# Altium PCB 7797-20-0224.PcbDoc (part 2 of 2)
Units mil, origin at the board's own origin, x right, y up, seen from the top; angles counter-clockwise.
Board outline 1680 x 2800 mil, 2 copper layers (Top Layer, Bottom Layer), stack 12.8 mil thick; 114 components, 80 nets, 405 pads, 230 vias.
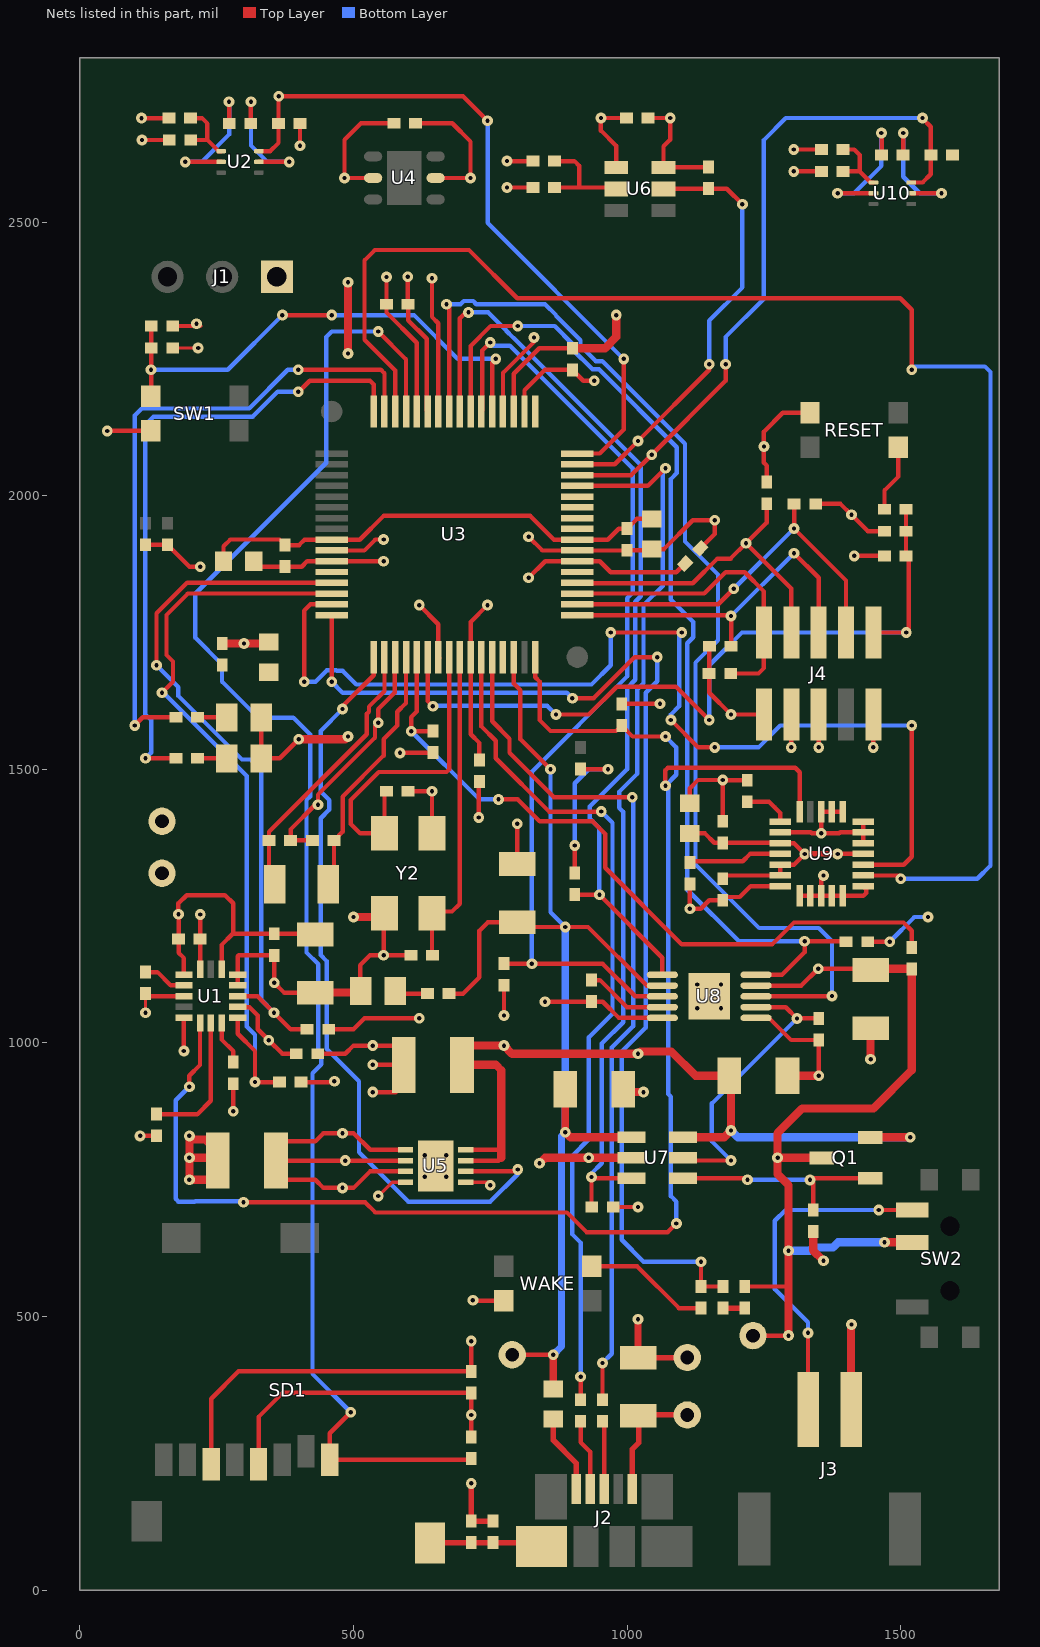
[diagram p2: the nets of this part, all layers, seen from the top]

## Via types
v1: diameter 19.68, hole 7.87, Top Layer to Bottom Layer, 230 vias

## Nets (pads, with @x,y where several pads share a name; then routed paths per layer and width w, separated by ;. In a path a pad name is that pad's centre, name@x,y a point inside that pad or via, vN(x,y) a via of type N, cw(c..) or ccw(c..) an arc to the next point about the centre after c; other vN are vias at no path point) (continued)
B3/sI2C0_SDA: R24.1 U1.6 U3.48 U9.12 | length 2922.4
  Top Layer w8: v1(200,920) 200,940 219.53,959.53 U1.6@219.53,1036.1 ; v1(298.87,708.87) 521.13,708.87 540,690 890,690 925.84,654.16 1074.16,654.16 v1(1090,670) ; U3.48@832.17,1705 832.16,1668.29 840,1660.46 840,1590 860,1570 979.69,1570 R24.1@990,1580.32 ; R24.1@990,1580 1010,1560 v1(1070,1560) ; v1(1070,1470) 1070,1498.34 1074.48,1502.81 1307.19,1502.81 1315.31,1494.69 U9.12@1315.31,1422.09
  Bottom Layer w8: v1(200,920) 175,895 175,715 180,710 210,710 210.84,710.84 296.9,710.84 v1(298.87,708.87) ; v1(1070,1560) 1090,1540 1090,1490 v1(1070,1470) 1075,1465 1075,906.52 1080,901.52 1080,720 1090,710 v1(1090,670)
C4/sIO_IND1: R7.2 U3.16 | length 1176.5
  Top Layer w8: v1(120,1520) R7.2@175.31,1520 ; v1(399.16,2190) 400,2190 420,2210 530,2210 536.89,2203.11 U3.16@536.89,2153.82
  Bottom Layer w8: v1(120,1520) 130,1530 130,1590 119.16,1600.84 119.16,2129.16 134.39,2144.39 315.61,2144.39 361.21,2190 v1(399.16,2190)
C5/sIO_IND2: R8.2 U3.15 | length 1211.5
  Top Layer w8: v1(100,1580) 115,1595 R8.2@175.31,1595 ; v1(399.16,2230) 550,2230 556.57,2223.43 U3.15@556.57,2153.82
  Bottom Layer w8: v1(100,1580) 100,2146.45 112.94,2159.39 309.39,2159.39 380,2230 v1(399.16,2230)
C6/sGYRO_INT2: U3.14 U9.2 | length 2760.6
  Top Layer w8: U3.14@576.26,2153.82 576.26,2228.74 520,2285 520,2430 539.06,2449.06 710.94,2449.06 799.16,2360.84 1499.16,2360.84 1520,2340 v1(1520,2230) ; U9.2@1431.46,1305.94 1499.06,1305.94 1500,1305 v1(1500,1300)
  Bottom Layer w8: v1(1500,1300) 1640,1300 1664,1324 1664,2226 1653.84,2236.16 v1@1520,2236.16
C7/sSD_CD: R14.1 SD1.1 U3.13 | length 2867.9
  Top Layer w8: v1(495,325) 456.38,286.38 SD1.1@456.38,237.95 712.64,237.95 R14.1@715,240.31 ; v1(545,2300) 595.94,2249.05 U3.13@595.94,2153.82
  Bottom Layer w8: v1(495,325) 425,395 425,944.54 441.16,960.7 441.16,977.63 435.84,982.94 435.84,1072.94 435.69,1073.1 435.69,1076.36 435.84,1076.51 435.84,1143.49 414.16,1165.17 414.16,1443.63 420.84,1450.32 420.84,1563.63 390,1594.48 325.52,1594.48 259.74,1660.26 259.74,1691.48 210.61,1740.61 210.61,1820.61 450,2060 450,2290 460,2300 v1(545,2300)
cGND: C21.2 J2.8 R15.2 SD1.12 | length 206.1
  Top Layer w10: SD1.12@639.84,86.38 836.93,86.38 J2.8@843.31,80
D0/sBMS_MODE: R22.2 U3.61 U7.3 | length 1660.3
  Top Layer w8: U3.61@908.94,2017.99 1037.99,2017.99 v1(1070,2050) ; R22.2@935.31,700 935,700.31 v1(935,755) 937.4,752.6 U7.3@1007.76,752.6
  Bottom Layer w8: v1(935,755) 935,761.28 953.84,780.12 953.84,998.84 992.87,1037.87 992.87,1422.13 985.37,1429.63 985.37,1458.66 1018.84,1492.13 1018.84,1646.1 1030,1657.26 1030,1800 1065,1835 1065,2045 v1(1070,2050)
D1/sTEMP_ALERT_R: R42.2 U3.62 U10.3 | length 1269.1
  Top Layer w8: U3.62@908.94,2037.68 1007.68,2037.68 v1(1045,2075) 1180,2210 v1(1180,2240) ; U10.3@1519.13,2572.32 1539.99,2572.32 1555,2587.33 R42.2@1555,2622.64 1555,2674.35 1539.88,2689.47 v1(1539.88,2690.12)
  Bottom Layer w8: v1(1180,2240) 1180,2290 1250,2360 1250,2650.12 1290,2690.12 v1(1539.88,2690.12)
D2/sLIGHT_INT: R28.2 U3.63 U6.6 | length 796.4
  Top Layer w8: U3.63@908.94,2057.36 977.36,2057.36 v1(1020,2100) 1150,2230 v1(1150,2240) ; U6.6@1066.5,2560.75 1066.81,2561.06 R28.2@1148.74,2561.06 1182.17,2561.06 v1(1210.68,2532.56)
  Bottom Layer w8: v1(1150,2240) 1150,2320 1210.68,2380.68 v1(1210.68,2532.56)
D3/sTEMP_ALERT_L: R9.2 U2.3 U3.64 | length 1298.5
  Top Layer w8: U2.3@327.01,2629.69 347.87,2629.69 362.87,2644.69 R9.2@362.87,2680 362.87,2729.56 v1(363.32,2730) 700,2730 v1(745,2685) ; U3.64@908.94,2077.05 950.03,2077.05 993.98,2121 v1(993.98,2250)
  Bottom Layer w8: v1(745,2685) 745,2498.57 993.57,2250 v1(993.98,2250)
D4/sUSB_DATA_N: R20.2 U3.43 | length 1548.8
  Top Layer w8: U3.43@733.74,1705 733.74,1578.26 760,1552 760,1520 857.27,1422.73 v1(952.73,1422.73) ; R20.2@915,347.87 v1(915,390)
  Bottom Layer w8: v1(915,390) 914.97,635.03 900,650 900,793.72 930,823.71 930,1010 973.21,1053.21 973.21,1402.24 v1(952.73,1422.73)
D5/sUSB_DATA_P: R23.2 U3.44 | length 1570.7
  Top Layer w8: U3.44@753.43,1705 753.42,1587.58 785,1556 785,1530 866.21,1448.79 v1(1009.21,1448.79) ; R23.2@955,347.87 v1(955,415)
  Bottom Layer w8: v1(955,415) 972,432 972,991.54 1010.87,1030.41 1010.87,1447.13 v1(1009.21,1448.79)
E0/sBMS_S\H\D\N\: U3.9 U8.8 | length 2108.2
  Top Layer w8: v1(670,2350) 674.68,2345.31 U3.9@674.69,2153.82 ; U8.8@1235.63,1085 1373.74,1085 v1(1374.37,1085.63)
  Bottom Layer w8: v1(670,2350) 695.52,2350 701.37,2355.84 718.63,2355.84 724.48,2350 850,2350 870,2330 870,2328.79 914.79,2284 914.79,2274 942.94,2245.84 954.85,2245.84 1105.84,2094.85 1105.84,1916.16 1166,1856 1166,1736 1125,1695 1125,1326.21 1241.21,1210 1350,1210 1374.37,1185.63 v1(1374.37,1085.63)
E1/sBMS_C\H\R\G\: R19.2 U3.8 U8.1 | length 1681.9
  Top Layer w8: U3.8@694.37,2153.82 694.37,2324.37 705,2335 v1(710,2335) ; 914.37,1270.94 949.05,1270.94 v1(949.37,1270.63) 1064.37,1155.63 U8.1@1064.37,1124.37
  Bottom Layer w8: v1(710,2335) 746.21,2335 779.16,2302.06 779.16,2301.37 791.37,2289.16 792.06,2289.16 1025,2056.21 1025,1816.21 1015,1806.21 1015,1663.47 1000,1648.47 1000,1500 931.89,1431.89 931.89,1409.85 949.37,1392.37 v1(949.37,1270.63)
E2/sBMS_A\C\P\R\: R38.2 U3.7 U8.10 | length 1899.2
  Top Layer w8: U3.7@714.06,2153.82 714.05,2273.53 750.52,2310 v1(800,2310) ; U8.10@1235.63,1124.37 1283.11,1124.37 1324.37,1165.63 v1(1324.37,1185.63) 1399.68,1185.63 R38.2@1400.31,1185
  Bottom Layer w8: v1(800,2310) 867.57,2310 899.79,2277.79 899.79,2267.79 936.73,2230.84 948.63,2230.84 1090.84,2088.63 1090.84,2041.37 1080,2030.52 1080,1810 1120.84,1769.16 1120.84,1741.37 1110,1730.52 1110,1280 1204.37,1185.63 v1(1324.37,1185.63)
E3/sBMS_\F\A\U\L\T\: R16.2 U3.6 U8.3 | length 1782.6
  Top Layer w8: U3.6@733.74,2153.82 735.42,2155.5 735.42,2265.42 v1(750,2280) ; R16.2@775,1144.68 v1@824.68,1144.68 ; v1(825.94,1144.68) 955.14,1144.68 1014.83,1085 U8.3@1064.37,1085
  Bottom Layer w8: v1(750,2280) 755.84,2274.16 785.84,2274.16 1010,2050 1010,1822.43 1000,1812.43 1000,1669.68 825.94,1495.63 v1(825.94,1144.68)
F1/sAG_INT1: R12.2 U1.11 U3.29 | length 1323.4
  Top Layer w8: v1(140,1690) 140,1785 195.83,1840.83 U3.29@460.12,1840.83 ; U1.11@288.42,1085.31 324.68,1085.31 v1(354.84,1055.16) 385,1025 R12.2@415.31,1025
  Bottom Layer w8: v1(140,1690) 180,1650 180,1633.93 296.12,1517.82 312.18,1517.82 331.16,1498.84 331.16,1078.84 v1(354.84,1055.16)
F2/sAG_INT2: R10.2 U1.9 U3.30 | length 1432.7
  Top Layer w8: v1(150,1640) 170,1660 170,1696.88 158.11,1708.78 158.11,1781.89 197.36,1821.14 U3.30@460.12,1821.14 ; U1.9@288.42,1045.94 288.42,1016.57 320,985 v1(320,928.33) 331.67,928.33 R10.2@365,928.33
  Bottom Layer w8: v1(150,1640) 152.72,1640 305,1487.72 305,1030 320,1015 v1(320,928.33)
F3/sGYRO_INT1: U3.31 U9.3 | length 1948.8
  Top Layer w8: v1(410,1660) 410,1790 421.46,1801.46 U3.31@460.12,1801.46 ; v1(970,1750) v1(1100,1750) ; v1(1080,1590) 1130,1540 v1(1160,1540) ; U9.3@1431.46,1325.63 1505.63,1325.63 1520,1340 v1(1520,1580)
  Bottom Layer w8: v1(410,1660) 430.52,1660 451.37,1680.84 468.63,1680.84 469.48,1680 480,1680 505,1655 935,1655 970,1690 v1(970,1750) ; v1(1080,1590) 1080,1600 1095,1615 1095,1745 v1(1100,1750) ; v1(1160,1540) 1240,1540 1280,1580 v1(1520,1580)
F4/sIO_SW1: C2.2 R2.1 SW1.1 U3.5 | length 932.4
  Top Layer w8: SW1.1@129.29,2181.5 130,2182.21 v1(130,2230) 130.31,2230.31 C2.2@130.31,2270 R2.1@130.31,2310 ; v1(370,2330) v1(460,2330) ; U3.5@753.43,2153.82 753.42,2243.42 v1(760,2250)
  Bottom Layer w8: v1(130,2230) 270,2230 v1(370,2330) ; v1(460,2330) 610.53,2330 690.53,2250 v1(760,2250)
NetC1_1: C1.1 U1.2 | length 80.1
  Top Layer w8: C1.1@120,1129.37 141.63,1129.37 166,1105 U1.2@190,1105
NetC8_1: C8.1 U1.8 | length 80.2
  Top Layer w8: U1.8@258.9,1036.1 258.9,1006.1 280,985 C8.1@280,964.68
NetC27_2: C27.2 U8.4 | length 149.8
  Top Layer w8: C27.2@935,1114.68 950.31,1114.68 999.68,1065.31 U8.4@1064.37,1065.31
NetC33_1: C33.1 U9.16 | length 171.5
  Top Layer w8: C33.1@1114.68,1330 1116.44,1331.76 1211.13,1331.76 1224.68,1345.31 U9.16@1279.88,1345.31
NetIND1_1: IND1.1 R7.1 | length 53.8
  Top Layer w8: R7.1@214.68,1520 IND1.1@268.5,1520
NetIND2_1: IND2.1 R8.1 | length 53.8
  Top Layer w8: R8.1@214.68,1595 IND2.1@268.5,1595
NetIND3_1: IND3.1 R13.1 | length 62.4
  Top Layer w8: IND3.1@575,1085 580,1090 R13.1@635.31,1090
NetJ2_1: J2.1 L1.1 | length 145
  Top Layer w10: L1.1@865,312.44 865,274 906.79,232.21 J2.1@906.79,184.72
NetJ2_2: J2.2 R20.1 | length 131
  Top Layer w8: R20.1@915,308.5 915,270 932.38,252.62 J2.2@932.38,184.72
NetJ2_3: J2.3 R23.1 | length 125
  Top Layer w8: R23.1@955,308.5 957.97,305.53 J2.3@957.97,184.72
NetJ2_5: J2.5 RS1.2 TP1.1 | length 229.6
  Top Layer w10: J2.5@1009.15,184.72 1009.15,257.15 1021,269 1021,317.35 RS1.2@1020,318.35 1021.65,320 TP1.1@1110,320
NetJ3_2: J3.2 SW2.3 | length 629.4
  Top Layer w8: J3.2@1330.63,330 v1(1330.63,470) ; v1(1460,694.69) 1520.94,694.69 SW2.3@1521.1,694.53
  Bottom Layer w8: v1(1330.63,470) 1330.63,489.37 1270,550 1270,675 1289.69,694.69 v1(1460,694.69)
NetQ1_1: Q1.1 R34.2 U7.4 | length 401.8
  Top Layer w8: U7.4@1102.24,752.6 1217.4,752.6 v1(1220,750) ; R34.2@1340,694.69 1340,743.94 v1(1334.29,749.65) 1337.24,752.6 Q1.1@1444.29,752.6
  Bottom Layer w8: v1(1220,750) 1333.94,750 v1(1334.29,749.65)
NetR25_1: R25.1 WAKE.3 | length 231.6
  Top Layer w8: WAKE.3@935,591.5 WAKE.3@935.71,591.5 1018.5,591.5 1094.68,515.31 R25.1@1135,515.31
NetR29_1: R29.1 R30.2 | length 40
  Top Layer w10: R29.1@1175,515.31 R30.2@1215,515.31
NetR40_1: R40.1 RESET.1 | length 124
  Top Layer w8: R40.1@1470.31,1975 1470.31,2009.61 1495.71,2035 RESET.1@1495.71,2088.5
OSC0: C15.2 U3.40 Y2.3 | length 599.4
  Top Layer w8: C15.2@560.31,1460 556.69,1456.38 Y2.3@556.69,1382.83 512.16,1382.83 495,1400 495,1443.79 546.21,1495 670,1495 674.68,1499.68 U3.40@674.69,1705
OSC1: C19.2 U3.41 Y2.1 | length 586.6
  Top Layer w8: C19.2@644.68,1160 643.31,1161.38 Y2.1@643.31,1237.16 646.14,1240 680,1240 694.37,1254.37 U3.41@694.37,1705
PB0: U3.45
PB4: U3.58
PB5: U3.57
PB6: U3.1
PB7: U3.4 | length 158.8
  Top Layer w8: U3.4@773.11,2153.82 773.11,2224.32 829.68,2280.9 v1(829.68,2289.16)
PD6: U3.53
PD7: U3.10 | length 248.5
  Top Layer w8: v1(643.31,2397.5) 643.31,2326.69 655,2315 U3.10@655,2153.82
PE4: U3.59
PE5: U3.60
PF0: U3.28
sAG_SA0: R3.1 U1.7 | length 251.3
  Top Layer w8: R3.1@140,869.68 214.68,869.68 239.21,894.21 U1.7@239.21,1036.1
sAG_SA1: R11.1 U1.10 | length 157
  Top Layer w8: U1.10@288.42,1065.63 289.05,1065 310,1065 325,1050 325,1025 v1(345,1005) 370,980 R11.1@395.31,980
sGND: C1.2 C2.1 C3.1 C4.1 C5.2 C6.2 C7.1 C8.2 C9.2 C10.1 C11.1 C12.2 C13.1 C14.1 C15.1 C16.2 C17.1 C18.1 C19.1 C20.2 C21.1 C22.1 C23.2 C24.1 C25.1 C26.2 C27.1 C28.1 C29.2 C30.2 C31.2 C32.2 C33.2 C34.1 C35.1 C36.1 C37.1 C38.1 C39.2 GND1.1 IND1.2 IND2.2 IND3.2 J1.1 J3.1 J4.3 J4.5 J4.9 R6.2 R11.2 R15.1 R18.2 R22.1 R31.2 R32.1 R34.1 R35.1 R37.2 RESET.4 RS1.1 SD1.6 SW1.3 TP2.1 U1.3 U1.5 U1.12 U1.13 U1.16 U2.2 U3.3 U3.12 U3.27 U3.35 U3.39 U3.55 U4.2 U5.4 U5.5 U5.9 U6.2 U7.2 U8.5 U8.6 U8.11 U9.1 U9.5 U9.6 U9.7 U9.8 U9.9 U9.10 U9.14 U9.19 U9.20 U9.21 U9.22 U9.23 U9.24 U10.2 WAKE.2 Y2.2 Y2.4 | length 8857.5
  Top Layer w6: v1(120,1055) C1.2@120,1090 ; C2.1@170,2269.68 C2.1@169.68,2270 v1(216,2270) ; C4.1@251.85,750 C4.1@251.85,785 251.85,801.35 C4.1@251.85,820 ; v1(545,720) 570.47,745.47 U5.4@594.88,745.47 ; U5.5@705.12,745.47 744.53,745.47 v1(750,740)
  Top Layer w8: v1(50,2118.29) 50.21,2118.5 SW1.3@129.29,2118.5 ; v1(113.31,2650) R6.2@163.19,2650 ; C1.2@120,1090 124.68,1085.31 U1.3@190,1085.31 ; v1(190,985) U1.5@190,1045.94 ; U1.16@219.53,1134.53 219.68,1134.68 C3.1@219.68,1190 v1(219.68,1234.68) ; SD1.6@239.84,230.08 239.84,349.84 289.68,399.68 C22.1@715,399.68 v1(715,455) ; v1(280,875) C8.2@280,925.31 ; U1.12@288.42,1105 U1.13@288.42,1124.68 288.42,1158.42 290,1160 C11.1@355,1160 v1(355,1110) 373.15,1091.85 C13.1@430,1091.85 ; C7.1@312.24,2680 312.24,2719.69 v1(312.56,2720) ; C5.2@317.56,1875 322.24,1870.31 C12.2@375,1870.31 405.31,1870.31 415.2,1880.2 560.2,1880.2 560,1880 v1(555,1880) ; U2.2@327.01,2610 v1(382.56,2610) ; IND2.2@331.5,1595 IND1.2@331.5,1520 365,1520 v1(400,1555) ; C9.2@345,1732.56 347.56,1730 C9.2@347.87,1729.68 ; C14.1@425,1370 C10.1@385,1370 385,1390 430,1435 v1(435,1435) 435,1453.79 539.16,1557.94 539.16,1579.16 v1(545,1585) 545,1610 575.16,1640.16 575.16,1703.9 U3.35@576.26,1705 ; R11.2@434.68,980 485,980 500,995 v1(535,995) 589.35,995 591.85,997.5 C18.1@591.85,960 ; IND3.2@512.01,1085 512.01,1095 512.01,1142.01 530,1160 v1(555,1160) ; v1(535,910) 576.85,910 591.85,925 C18.1@591.85,960 ; v1(535,960) C18.1@591.85,960 ; Y2.4@556.69,1237.16 555,1235.47 v1(555,1160) ; v1(560.31,2399.68) C16.2@560.31,2350 560.31,2334.68 615.63,2279.37 U3.12@615.63,2153.82 ; v1(585,1530) 585.31,1530.31 C20.2@645,1530.31 ; C15.1@599.68,1460 v1(643.31,1460) Y2.2@643.31,1382.83 ; C19.1@605.31,1160 v1(555,1160) ; C17.1@613.11,2680.63 680.21,2680.63 713.74,2647.09 v1(713.74,2580.63) U4.2@654.37,2580.63 ; v1(620,1800) 655,1765 U3.39@655,1705 U3.39@656.68,1703.31 ; v1(718.12,529.77) 716.86,528.5 WAKE.2@774.29,528.5 ; v1(729,1412) C23.2@729,1479 ; v1(780.55,2611.5) R18.2@827.8,2611.5 ; U3.3@792.8,2153.82 792.79,2222.79 839.37,2269.37 C26.2@900,2269.37 ; C24.1@799.37,1326.93 v1(799.37,1400.63) ; v1(820,1925) 845.12,1899.88 999.57,1899.88 C29.2@1000,1900.31 1042.87,1900.31 C30.2@1045,1902.44 1067.44,1902.44 1120,1955 v1(1160,1955) 1160,1930 C31.2@1133.92,1903.92 ; v1(850,1075) 934.68,1075 C27.1@935,1075.31 955.31,1075.31 985,1045.63 U8.5@1064.37,1045.63 ; R22.1@974.68,700 v1(1020,700) ; U6.2@979.89,2600.12 979.89,2639.47 952.14,2667.21 v1(952.14,2690.12) C28.1@998.74,2690.12 ; C30.2@1037.87,1910.31 C30.2@1040,1912.44 ; C33.2@1114.68,1290.63 v1(1114.68,1245.31) 1134.68,1245.31 1150,1260.63 C34.1@1174.68,1260.63 ; C32.2@1114.68,1437.87 1114.68,1465.31 1129.68,1480.31 v1(1174.68,1480.31) ; C35.1@1174.68,1410 1174.68,1470.31 ; C34.1@1175.31,1266.57 1205.94,1266.57 1225.63,1286.26 U9.19@1279.88,1286.26 ; v1@1184.37,1480 R31.2@1219.68,1480 ; U8.6@1235.63,1045.63 1259.37,1045.63 1299.68,1005.31 R35.1@1350,1005.31 v1(1350,940) ; R32.1@1255,2024.68 1255,2055 1250,2060 v1(1250,2090) 1250,2116.89 1284.61,2151.5 RESET.4@1334.29,2151.5 ; U9.14@1279.88,1384.68 1335.69,1384.68 1337.37,1383 v1(1354.68,1383) ; v1(1300,1540) J4.3@1300,1600 ; v1(1304.69,2592.64) R37.2@1355.32,2592.64 ; U9.20@1315.31,1268.54 U9.21@1335,1268.54 U9.22@1354.68,1268.54 ; v1(1350,1540) J4.5@1350,1600 ; v1(1359,1306) 1354.68,1301.68 U9.22@1354.68,1268.54 ; U9.8@1394.05,1422.09 U9.9@1374.37,1422.09 U9.10@1354.68,1422.09 v1(1354.68,1383) ; v1(1415,1890) C39.2@1470.31,1890 ; U9.1@1431.46,1286.26 1437,1280.72 1437,1274 1431.54,1268.54 U9.24@1394.05,1268.54 U9.23@1374.37,1268.54 U9.22@1354.68,1268.54 ; U9.5@1431.46,1365 U9.6@1431.46,1384.68 ; U9.7@1431.46,1404.37 U9.6@1431.46,1384.68 ; v1(1450,1540) J4.9@1450,1600 ; C38.1@1504.37,2622.64 1504.37,2662.32 v1(1504.69,2662.64) ; U10.2@1519.13,2552.64 v1(1574.69,2552.64) ; v1(1354.68,1383) 1387.63,1383 1389.31,1384.68 U9.6@1431.46,1384.68
  Top Layer w10: v1(715,195) C21.1@715,126.06 R15.1@755,126.06 ; RS1.1@1020,424.65 1109.65,424.65 TP2.1@1110,425
  Top Layer w13: RS1.1@1020,424.65 v1(1020,495)
  Top Layer w15: C4.1@251.85,750 v1(200,750) v1(200,790) ; C4.1@251.85,785 246.85,790 v1(200,790) ; C4.1@251.85,801.35 229.77,823.43 206.57,823.43 v1(200,830) v1(200,790) ; C6.2@260,1729.68 299.68,1729.68 v1(300,1730) C9.2@347.56,1730 ; v1(400,1555) 485,1555 v1(490,1560) ; C13.1@430,1091.85 508.86,1091.85 IND3.2@512.01,1095 ; v1(490,2260) v1(490,2390) ; v1(500,1230) 549.53,1230 Y2.4@555,1235.47 ; v1(840,780) 850,790 v1(930,790) U7.2@1007.76,790 ; C26.2@900,2269.37 959.37,2269.37 980,2290 v1(980,2330) ; C25.1@993.15,915 998.15,910 v1(1030,910) ; C36.1@1293.15,940 v1(1350,940) ; R34.1@1340,655.32 1340,620.86 v1(1359,601.86) ; J3.1@1409.37,330 1409.37,484.65 v1(1410,485.28) ; v1(1445,970) C37.1@1445,1026.85
  Bottom Layer w8: v1(312.56,2720) 312.56,2640 342.56,2610 v1(382.56,2610) ; v1(1504.69,2662.64) 1504.69,2582.64 1534.69,2552.64 v1(1574.69,2552.64)
  other v1: 630.31,755.31 669.68,755.31 630.31,794.68 669.68,794.68 1128.35,1063.35 1171.65,1063.35 1128.35,1106.65 1171.65,1106.65
sGYRO_SA0: R31.1 U9.13 | length 84.4
  Top Layer w8: R31.1@1219.68,1440.63 1259.37,1440.63 1269.68,1430.31 1279.88,1420.12 U9.13@1279.88,1404.37
sH\I\B\: U3.33 U5.6 | length 1440.3
  Top Layer w8: v1(480,1610) 480,1615 536.89,1671.89 U3.33@536.89,1705 ; U5.6@705.12,765.16 796.44,765.16 v1(800,768.72)
  Bottom Layer w8: v1(480,1610) 440,1570 440,1459.48 455.84,1443.63 455.84,1426.37 440,1410.52 440,1160.54 450.84,1149.7 450.84,989.16 510,930 510,800 600,710 750,710 800,760 v1(800,768.72)
sLIGHT_ADDR: R17.1 R18.1 U6.3 | length 202
  Top Layer w8: R17.1@867.17,2563.27 912.18,2563.27 ; R18.1@867.17,2611.5 903.63,2611.5 912.18,2602.94 912.18,2563.27 ; U6.3@979.89,2560.75 977.37,2563.27 912.18,2563.27
sPM_MODE/sBMS_PROG: R35.2 U7.5 U8.7 | length 551.3
  Top Layer w8: U7.5@1102.24,790 1107.24,785 v1(1190,785) ; U8.7@1235.63,1065.31 1289.68,1065.31 v1(1310.31,1044.68) R35.2@1350,1044.68
  Bottom Layer w8: v1(1190,785) 1155,820 1155,889.37 v1(1310.31,1044.68)
sPWR_3V3: C3.2 C4.2 C6.1 C7.2 C9.1 C11.2 C13.2 C16.1 C17.2 C22.2 C23.1 C26.1 C28.2 C31.1 C32.1 C34.2 C35.2 C38.2 J4.1 LDO1.1 R1.2 R2.2 R3.2 R4.2 R5.2 R9.1 R10.1 R12.1 R14.2 R16.1 R17.2 R19.1 R21.2 R24.2 R26.1 R27.1 R28.1 R33.1 R36.2 R38.1 R39.2 R42.1 SD1.4 U1.1 U1.14 U2.5 U3.2 U3.11 U3.26 U3.42 U3.54 U4.5 U5.1 U5.2 U5.3 U6.1 U9.4 U9.15 U9.17 U9.18 U10.5 | length 6083.6
  Top Layer w8: v1(110,830) 139.69,830 R3.2@140,830.31 ; v1(112.56,2690) R5.2@162.87,2690 ; R1.2@120,1910.31 R4.2@160,1910.31 200.32,1870 v1(220,1870) ; R2.2@169.68,2310 220,2310 216,2314 v1(213,2314) ; U1.1@190,1124.68 190,1155 180.31,1164.68 C3.2@180.31,1190 180.31,1234.68 v1(180,1235) 180,1255 195,1270 265,1270 280,1255 280,1200 279.37,1199.37 ; v1(192.56,2610) U2.5@258.11,2610 ; U1.14@258.9,1134.53 258.9,1178.9 279.37,1199.37 ; v1(272.56,2720) 272.87,2719.69 C7.2@272.87,2680 ; SD1.4@326.46,230.08 326.46,316.46 370.31,360.31 C22.2@715,360.31 v1(715,320) R14.2@715,279.68 ; 380.16,784.84 v1(485,784.84) U5.2@594.88,784.84 ; v1(402.24,2639.47) R9.1@402.24,2680 ; R10.1@404.37,928.33 463.33,928.33 v1(465,930) ; C13.2@430,1198.15 428.78,1199.37 C11.2@355,1199.37 279.37,1199.37 ; R12.1@454.68,1025 500,1025 520,1045 v1(620,1045) ; U3.26@460.12,1899.88 519.88,1899.88 540,1920 v1(555,1920) ; U4.5@540.2,2580.63 527.9,2580.63 v1(483.43,2580.63) 483.43,2650.32 513.74,2680.63 C17.2@573.74,2680.63 ; U5.3@594.88,765.16 530.16,765.16 500,735 v1(480,735) 445,735 430,750 358.31,750 358.31,784.84 C4.2@358.15,785 358.15,820 430,820 445,835 v1(480,835) 500,835 530.47,804.53 U5.1@594.88,804.53 ; v1(599,2400) 599,2350.69 C16.1@599.68,2350 599.69,2320.77 633.63,2286.83 633.63,2155.5 U3.11@635.32,2153.82 ; C23.1@730,1516.68 730,1548 714.05,1563.95 U3.42@714.06,1705 714.05,1769.05 v1(745,1800) ; v1(775,1050) R16.1@775,1105.31 ; v1(780.44,2563.27) R17.2@827.8,2563.27 ; U3.2@812.48,2153.82 812.48,2192.48 850,2230 C26.1@900,2230 920,2210 v1(940,2210) ; v1(820,1850) 850.2,1880.2 U3.54@908.94,1880.2 949.8,1880.2 970,1860 1090,1860 C31.1@1106.08,1876.08 ; R19.1@904.37,1310.31 v1(904.37,1360.63) ; R21.2@915,1500.31 964.68,1500.31 v1(965,1500) ; R24.2@990,1619.69 v1(1060,1619.69) ; C28.2@1038.11,2690.12 v1(1078.74,2690.12) 1078.74,2650.75 1066.5,2638.5 U6.1@1066.5,2600.12 1066.66,2600.28 1148.59,2600.28 R28.1@1148.74,2600.43 ; C32.1@1114.68,1382.76 1142.24,1382.76 1159.37,1365.63 C35.2@1174.68,1365.63 ; R27.1@1150.31,1725 1150,1724.68 R26.1@1150,1675 1150,1640 v1(1190,1600) J4.1@1250,1600 ; C34.2@1174.68,1300 1180.63,1305.94 U9.18@1279.88,1305.94 U9.17@1279.88,1325.63 1305,1325.63 v1(1324.68,1345.31) 1305,1365 U9.15@1279.88,1365 1279.25,1365.63 C35.2@1174.68,1365.63 ; C35.2@1174.68,1370.63 C35.2@1178.63,1366.68 ; C35.2@1175.31,1365 C35.2@1174.68,1365.63 ; v1(1304.69,2632.64) R36.2@1355,2632.64 ; R33.1@1344.68,1985 1390,1985 v1(1410,1965) 1440,1935 R39.2@1470.31,1935 ; v1(1384.68,1345.31) U9.4@1431.46,1345.31 ; v1(1384.69,2552.64) U10.5@1450.24,2552.64 ; R38.1@1439.68,1185 v1(1480,1185) ; v1(1464.69,2662.64) 1465,2662.32 C38.2@1465,2622.64
  Top Layer w10: v1(1324.68,1345.31) v1(1384.68,1345.31)
  Bottom Layer w8: v1(192.56,2610) 222.56,2610 272.56,2660 v1(272.56,2720) ; v1(904.37,1360.63) 904.37,1474.37 930,1500 v1(965,1500) ; v1(1384.69,2552.64) 1414.69,2552.64 1464.69,2602.64 v1(1464.69,2662.64) ; v1(1480,1185) 1525,1230 v1(1550,1230)
sPWR_3V7: BAT1.1 C37.2 Q1.3 R30.1 R41.2 SW2.2 U8.9 | length 1606.9
  Top Layer w8: R30.1@1215,554.68 1294.68,554.68 1295,555 ; BAT1.1@1235,465 v1(1295,465) ; U8.9@1235.63,1104.68 1318.42,1104.68 v1(1349.37,1135.63) 1443.78,1135.63 C37.2@1444.09,1135.31
  Top Layer w15: v1(1295,465) 1295,555 v1(1295,620) 1295,740 1275,760 v1(1275,790) ; Q1.3@1355.71,790 v1(1275,790) ; C37.2@1444.09,1135.31 R41.2@1520,1135.31 1520,950 1450,880 1320,880 1275,835 v1(1275,790) ; v1(1470.31,635.47) SW2.2@1521.1,635.47
  Bottom Layer w15: v1(1295,620) 1333.13,620 1339.34,626.2 1376.2,626.2 1385.47,635.47 v1(1470.31,635.47)
sPWR_5V0: C24.2 C25.2 L1.2 R13.2 U3.46 U7.1 U8.2 USB1.1 | length 2192.7
  Top Layer w8: R13.2@674.68,1090 700,1090 730,1120 730,1205 745.63,1220.63 C24.2@799.37,1220.63 ; USB1.1@790,430 v1(865,430) ; U3.46@792.8,1705 792.79,1656.75 805,1644.54 805,1555 v1(860,1500) ; C24.2@814.37,1220.63 823.15,1211.85 v1(886.85,1211.85) 928.6,1211.85 1035.77,1104.68 U8.2@1064.37,1104.68
  Top Layer w13: L1.2@865,367.56 v1(865,430) ; v1(886.85,836.85) C25.2@886.85,915
  Top Layer w15: v1(886.85,836.85) 896.3,827.4 U7.1@1007.76,827.4
  Bottom Layer w8: v1(860,1500) 860,1238.7 v1(886.85,1211.85)
  Bottom Layer w13: v1(865,430) 880,445 880,830 v1(886.85,836.85) ; v1(886.85,1211.85) v1(886.85,836.85) ; v1@889.53,836.85 v1(886.85,836.85)
sR\E\S\E\T\: C39.1 J4.10 R39.1 R40.2 U3.38 | length 1429.2
  Top Layer w8: U3.38@635.32,1705 635.31,1624.68 v1(645,1615) ; v1(870,1600) 930,1600 980.84,1650.84 1089.16,1650.84 v1(1150,1590) ; J4.10@1450,1750 1515,1750 1515,1884.69 C39.1@1509.68,1890 R39.1@1509.68,1935 R40.2@1509.68,1975
  Bottom Layer w8: v1(645,1615) 645.84,1615.84 854.16,1615.84 v1(870,1600) ; v1(1150,1590) 1150,1690 1210,1750 v1(1510,1750)
"sTEMP_ADD0_Temperature Left": R5.1 R6.1 U2.4 | length 128.9
  Top Layer w8: R5.1@202.24,2690 223,2690 233,2680 233,2650 ; R6.1@202.56,2650 233,2650 ; U2.4@258.11,2629.69 253.32,2629.69 233,2650
"sTEMP_ADD0_Temperature Right": R36.1 R37.1 U10.4 | length 129.1
  Top Layer w8: R36.1@1394.37,2632.64 1415.13,2632.64 1425.13,2622.64 1425.13,2592.64 ; R37.1@1394.53,2592.8 R37.1@1394.69,2592.64 1425.13,2592.64 ; U10.4@1450.24,2572.32 1445.44,2572.32 1425.13,2592.64
sUNREG: C18.2 C36.2 Q1.2 U5.7 U5.8 U7.6 | length 1521.6
  Top Layer w8: C18.2@690,950 708.15,950 C18.2@698.15,960 ; U5.7@705.12,784.84 764.84,784.84 770,790 ; U5.8@705.12,804.53 765.47,804.53 770,800
  Top Layer w15: 770,790 770,800 770,950 760,960 C18.2@698.15,960 698.15,995 v1(775,995) 790,980 v1(1020,980) 1024.34,984.34 1080.66,984.34 1125,940 C36.2@1186.85,940 ; U7.6@1102.24,827.4 1177.4,827.4 v1(1190,840) 1190,908.15 C36.2@1191.85,910 ; Q1.2@1444.29,827.4 v1(1517.4,827.4)
  Bottom Layer w15: v1(1190,840) 1202.6,827.4 v1(1517.4,827.4)
sVBAT: C20.1 R41.1 U3.37 | length 1350.1
  Top Layer w8: U3.37@615.63,1705 615.63,1605.63 605.31,1595.31 v1(605.31,1569.68) C20.1@645,1569.68 ; v1(765,1445) 800,1445 840.27,1404.73 937.01,1404.73 960,1381.74 960,1320 1100,1180 1265,1180 1305,1220 1505,1220 1520,1205 R41.1@1520,1174.68
  Bottom Layer w8: v1(605.31,1569.68) 730,1445 v1(765,1445) v1@768.84,1448.84
sVDDC: C5.1 C12.1 C29.1 C30.1 U3.25 U3.56 | length 880.3
  Top Layer w8: C5.1@262.44,1875 C5.1@262.44,1880 262.44,1907.44 275,1920 364.68,1920 C12.1@375,1909.68 400.55,1909.68 410.43,1919.57 U3.25@460.12,1919.57 511.57,1919.57 555,1963 823,1963 866.43,1919.57 U3.56@908.94,1919.57 964.57,1919.57 984.68,1939.68 C29.1@1000,1939.68 1017.87,1957.56 C30.1@1045,1957.56
sW\A\K\E\: R25.2 R29.2 U3.32 | length 2099.1
  Top Layer w8: v1(460,1660) 460.12,1660.12 U3.32@460.12,1781.77 ; v1(900,1630) 938.79,1630 1013.79,1705 v1(1055,1705) ; v1(1135,600) R25.2@1135,554.68 R29.2@1175,554.68
  Bottom Layer w8: v1(460,1660) 480,1640 890,1640 v1(900,1630) ; v1(1055,1705) 1055,1661.04 1033.84,1639.89 1033.84,1027.93 990,984.09 990,640 1030,600 v1(1135,600)
TCK: J4.4 R32.2 U3.52 | length 623.9
  Top Layer w8: U3.52@908.94,1840 1120,1840 1165,1885 1189.16,1885 v1(1217.31,1913.15) ; R32.2@1255,1985.31 1255,1950.84 v1(1217.31,1913.15) ; J4.4@1300,1750 1300,1830.46 v1(1217.31,1913.15)
TDI: J4.8 R33.2 U3.50 | length 727.3
  Top Layer w8: U3.50@908.94,1801.46 1166.46,1801.46 v1(1195,1830) ; v1@1304.68,1940.31 v1(1305,1940) 1400,1845 J4.8@1400,1750 ; v1@1305.31,1940.94 R33.2@1305.31,1985
  Bottom Layer w8: v1(1195,1830) v1(1305,1940)
TDO: J4.6 R27.2 U3.49 | length 663.2
  Top Layer w8: U3.49@908.94,1781.77 1188.23,1781.77 v1(1190,1780) 1190,1725.31 R27.2@1189.68,1725 ; v1(1305,1895) 1350,1850 J4.6@1350,1750
  Bottom Layer w8: v1(1190,1780) v1(1305,1895)
TMS: J4.2 R26.2 U3.51 | length 576.4
  Top Layer w8: U3.51@908.94,1821.14 1141.14,1821.14 1180,1860 1215,1860 1250,1825 J4.2@1250,1750 1250,1685 1240,1675 R26.2@1189.37,1675
XOSC0: C10.2 U3.34 Y1.1 | length 506.6
  Top Layer w8: Y1.1@355.79,1290 345.63,1300.16 C10.2@345.63,1370 345.63,1385.63 524.16,1564.16 524.16,1601.26 528.34,1605.44 528.34,1614.56 556.57,1642.79 U3.34@556.57,1705
XOSC1: C14.2 U3.36 Y1.2 | length 473.7
  Top Layer w8: Y1.2@454.21,1290 464.37,1300.16 C14.2@464.37,1370 480,1385.63 480,1450 555,1525 555,1555 580,1580 580,1605 595.94,1620.94 U3.36@595.94,1705
pads on no net: J2.4 J2.6 J2.7 J2.9 J2.10 J2.11 J3.0 J4.7 RESET.2 RESET.3 SD1.8 SD1.9 SD1.10 SD1.11 SW1.2 SW1.4 SW2.1 SW2.MH1 SW2.MH2 SW2.MP1 SW2.MP2 SW2.MP3 SW2.MP4 U1.15 U3.65 U3.66 U4.3 U4.4 U4.7 WAKE.1 WAKE.4
copper on no net:
  other v1: 573.23,2541.26 612.6,2541.26 573.23,2580.63 612.6,2580.63 573.23,2620 612.6,2620

## Polygon pours and split planes (outlines as drawn)
sGND on Bottom Layer "Bottom layer_full" (solid, remove dead copper, pour order 4): 0,2800 1680,2800 1680,0 0,0
sPWR_3V3 on Top Layer "Top layer_full" (solid, remove dead copper, pour order 2): 0,2800 1680,2800 1680,0 0,0

## Keep-outs
Keep-Out Layer:
  lines w10: 0,0 0,2800 1680,2800 1680,0 0,0

## Other copper
Top Layer:
  pour cut-out: 975,1633.63 983.52,1642.14 989.32,1642.14 993.04,1645.87

## Silkscreen, mask and mechanical layers (free items; w line width, h text height)
Top Overlay:
  text "Tx Rx GND" at 141.22,2465.98 h30
Top Solder:
  region: 510,2630
Bottom Solder:
  region: 545,2639.47 640,2639.47 640,2521.38 545,2521.38
Mechanical 1:
  lines w10: 0,0 1680,0 1680,2800 0,2800 0,0

## Text inside footprints (layer, text, board x,y; h text height)
J2: Mechanical 6 "PCB EDGE" at 674.51,18.7 h11.81
J3: Top Overlay "+ -" at 1294.68,420 h60